# Altium PCB Oscilador.PcbDoc
Units mm, origin at the board's own origin, x right, y up, seen from the top; angles counter-clockwise.
Board outline 152.4 x 101.6 mm, 2 copper layers (Top Layer, Bottom Layer); 11 components, 10 nets, 31 pads, 2 vias.
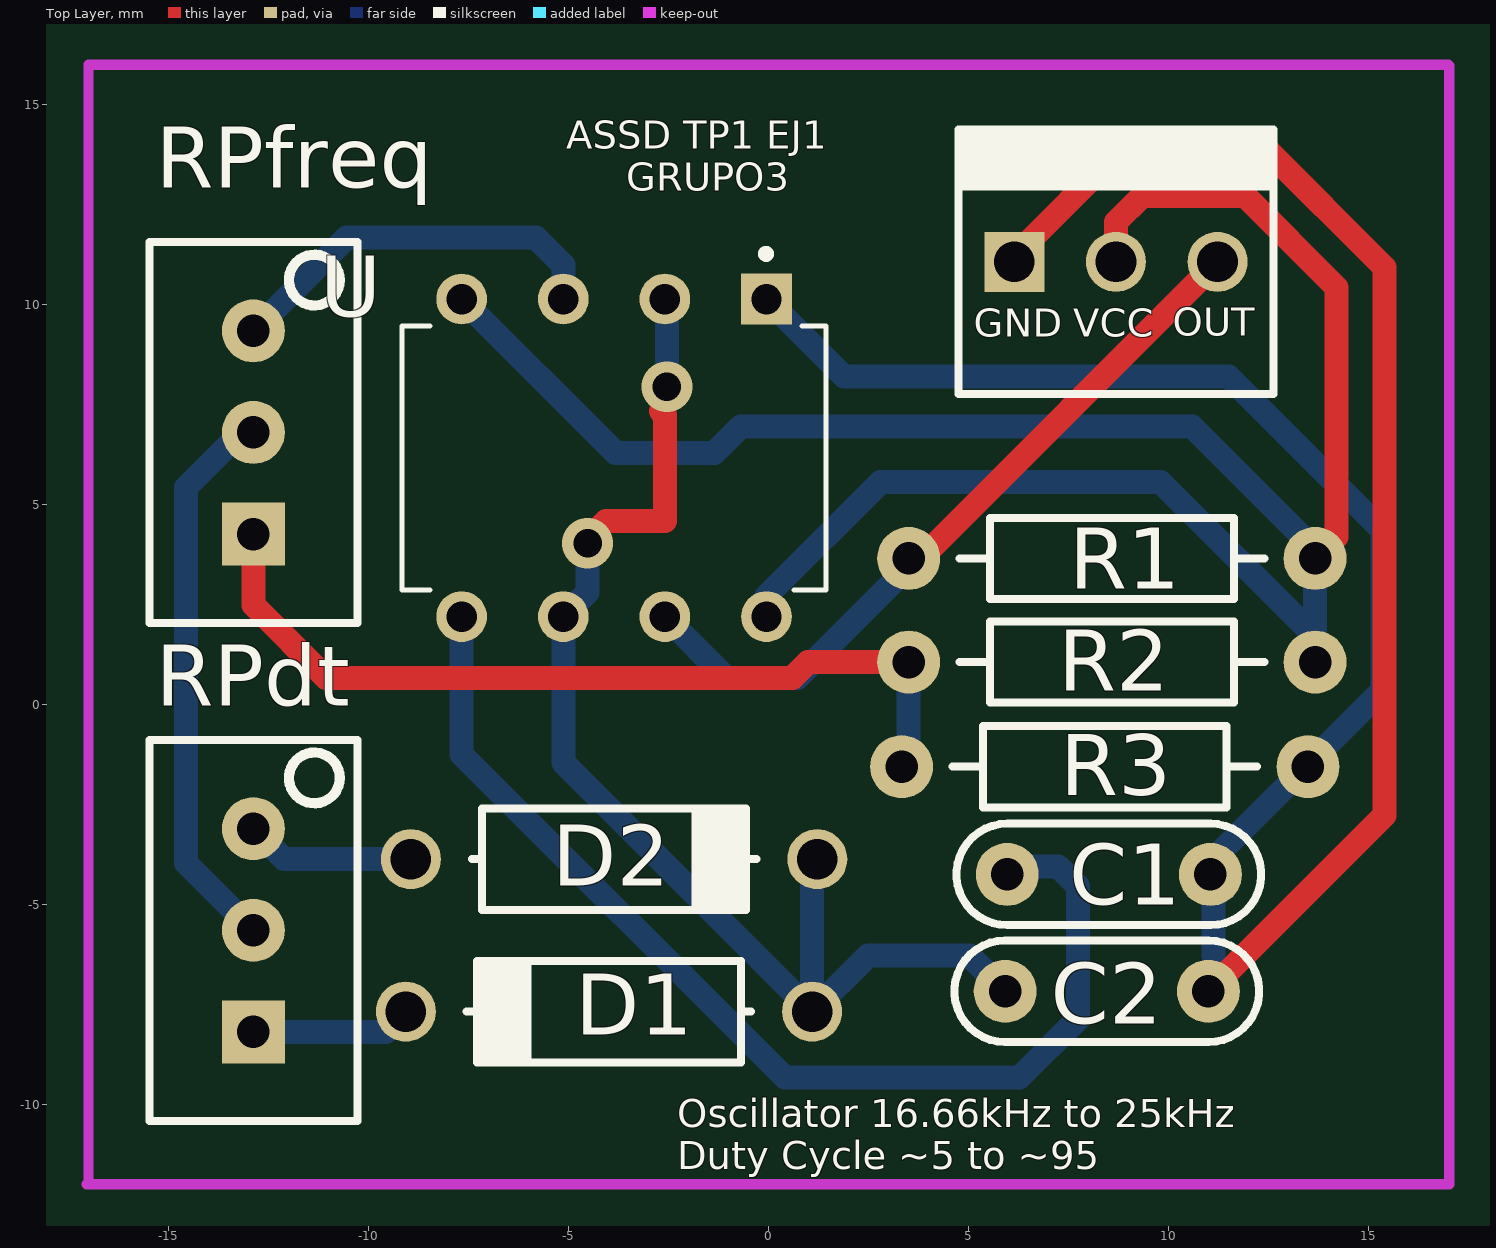
[diagram p0: Top Layer view]
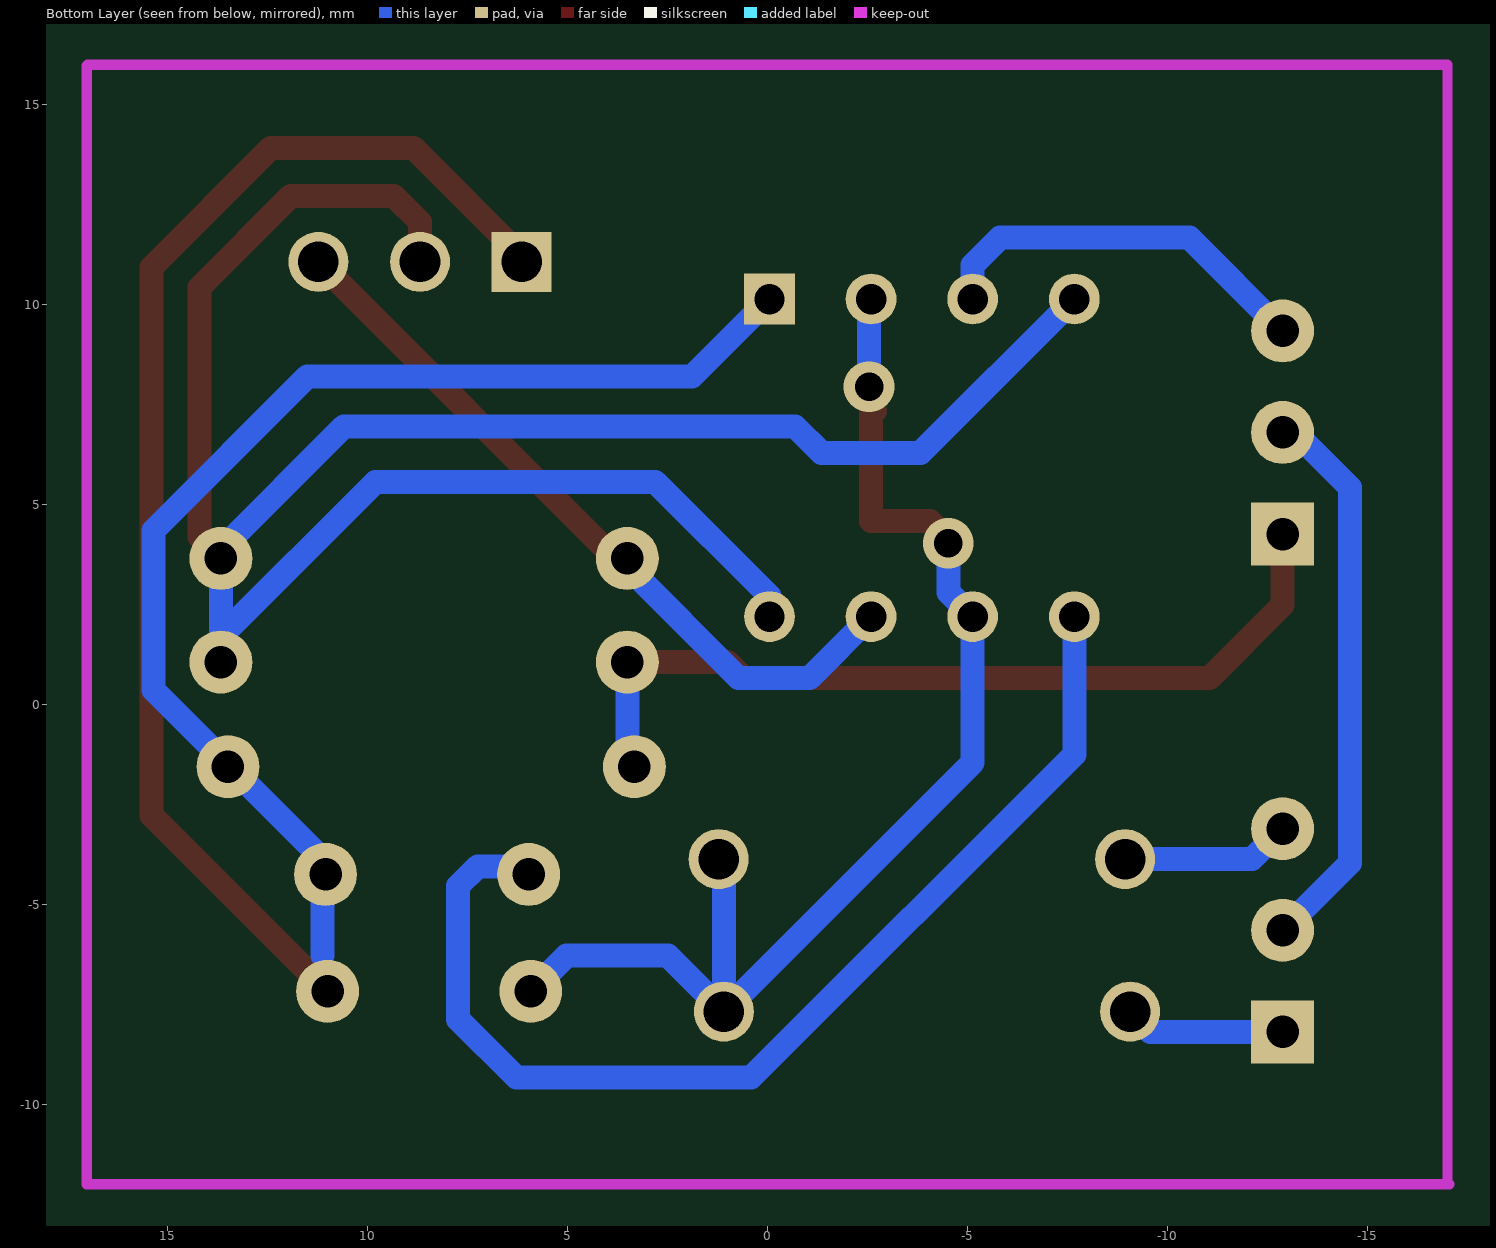
[diagram p1: Bottom Layer view, seen from below]
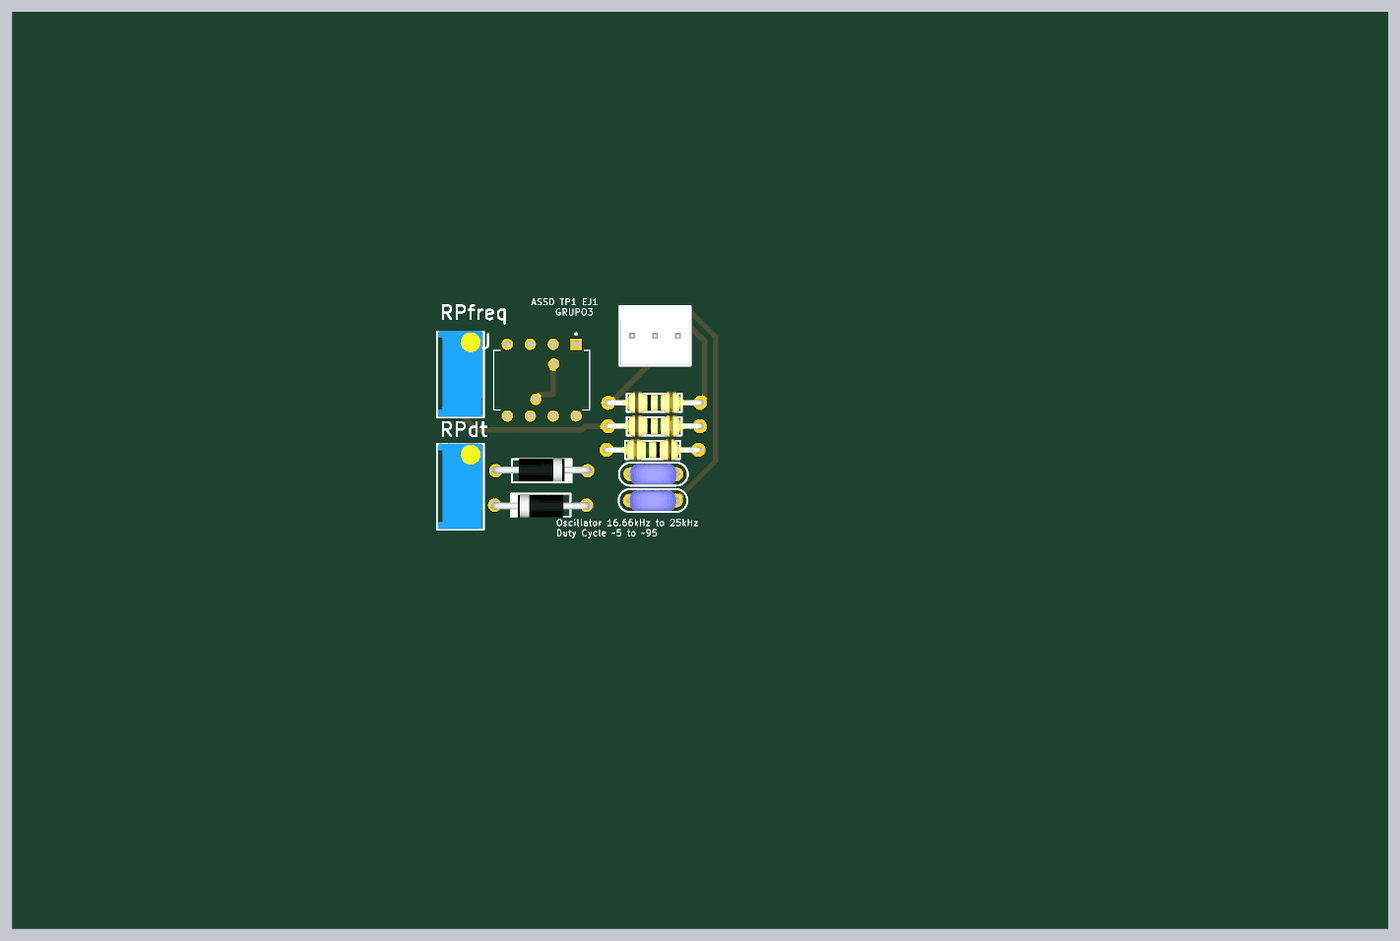
[diagram p2: 3D render of the assembled board from above, using the file's embedded part models]

## Layer stack, top to bottom
Top Solder: solder mask 0.0102, Solder Resist, Dk 3.5
Top Layer: signal copper 0.0356
Dielectric 1: dielectric 0.32, FR-4, Dk 4.8
Bottom Layer: signal copper 0.0356
Bottom Solder: solder mask 0.0102, Solder Resist, Dk 3.5

## Board outline
-62.509,-54.61 89.891,-54.61 89.891,46.99 -62.509,46.99

## Design rules (kind name [scope] priority, off if disabled: settings)
Clearance [All] p1: gap=0.6 ignorepadtopadclearanceinfootprint=FALSE
PolygonConnect [All] p1: connectstyle=Relief reliefconductorwidth=0.254 reliefentries=4 polygonreliefangle="90 Angle" airgapwidth=0.254
RoutingVias [All] p1: holewidth=0.711 width=1.27 viastyle="Through Hole" minholewidth=0.711 minwidth=1.27 maxholewidth=0.711 maxwidth=1.27
SolderMaskExpansion [All] p1: expansion=0.102
Width [All] p1: maxlimit=0.6 minlimit=0.6 preferedwidth=0.6
30 further rules are at their usual default settings.

## Classes and differential pairs
component class Oscilador: C1 C2 D1 D2 R1 R2 R3 RPdt RPfreq U

## Components (designator, comment, footprint, x,y, rotation, side; value= is the part's Value field where it differs from the comment)
C1 "CAP" CAP200 8.509,-4.242 r0 top
C2 "CAP" CAP200 8.458,-7.163 r0 top
D1 "DIODO" DO41 -3.988,-7.671 r180 top
D2 "DIODO" DO41 -3.861,-3.861 r0 top
R1 "RES" RES400 3.505,3.658 r0 top
R2 "RES" RES400 3.505,1.067 r0 top
R3 "RES" RES400 13.487,-1.549 r180 top
RPdt "POTENCIOMETRO" "PRESET V" -12.878,-5.639 r90 top
RPfreq "POTENCIOMETRO" "PRESET V" -12.878,6.807 r90 top
U "NE555" DIP794W45P254L1060H508Q8 -3.861,6.172 r270 top
? "Comment" MOLEX3 6.147,11.074 r0 top

## Footprints (in the part's own frame and the unit in brackets; to place one, negate y for a bottom-side part, rotate by r counter-clockwise, add the part's x,y. Pads: shape width x height; smd on the part's side, far side on the other; paste and mask are expansions set on the pad)
CAP200 [mil]
  round 62 hole 32: 1(-100,0) 2(100,0)
  silkscreen extent -150,-50 150,50, body extent -110,-46 110,44, height 246
DIP794W45P254L1060H508Q8 [mm]
  rect 1.268x1.268 hole 0.76: 1(-3.97,3.81)
  round 1.268 hole 0.76: 2(-3.97,1.27) 3(-3.97,-1.27) 4(-3.97,-3.81) 5(3.97,-3.81) 6(3.97,-1.27) 7(3.97,1.27) 8(3.97,3.81)
  silkscreen extent -5.2,-5.3 3.3,5.3
DO41 [mm]
  round 1.5 hole 1.016: 1(-5.08,0) 2(5.08,0)
  silkscreen extent -3.56,-1.27 3.56,1.27, body extent -5.46,-1.19 5.46,1.37, height 2.03
MOLEX3 [mm]
  rect 1.5x1.5 hole 1.016: 1(0,0)
  round 1.5 hole 1.016: 2(2.54,0) 3(5.08,0)
  silkscreen extent -1.4,-3.3 6.48,3.3, body extent -1.27,-3.17 6.35,3.17, height 10.74
"PRESET V" [mil]
  rect 62x62 hole 32: 1(-100,0)
  round 62 hole 32: 2(0,0) 3(100,0)
  silkscreen extent -188,-102 188,102, body extent -185,-95 190,95, height 455
RES400 [mil]
  round 62 hole 32: 1(0,0) 2(400,0)
  silkscreen extent 50,-40 350,40, body extent -12,-45 412,46, height 96

## Part data
U: "555 Type, Timer/Oscillator _Single_ IC 100kHz 8-SOIC", Package="SOIC-8 Conrad", Availability=Unavailable, MF="Texas Instruments", MP=NE555, Price=None, SnapEDA_Link=https://www.snapeda.com/parts/NE555/Texas%20Instruments/view-part/1756807/?ref=snap

## Via types
v1: diameter 1.27, hole 0.711, Top Layer to Bottom Layer, 2 vias

## Nets (pads, with @x,y where several pads share a name; then routed paths per layer and width w, separated by ;. In a path a pad name is that pad's centre, name@x,y a point inside that pad or via, vN(x,y) a via of type N, cw(c..) or ccw(c..) an arc to the next point about the centre after c; other vN are vias at no path point)
GND: ?.1 C1.2 C2.2 R3.1 U.1 | length 61.9
  Top Layer w0.6: ?.1 6.147,11.222 8.849,13.924 12.407,13.924 15.399,10.933 15.399,-2.762 C2.2
  Bottom Layer w0.6: U.1 1.887,8.204 11.505,8.204 15.353,4.357 15.353,0.367 11.125,-3.861 11.125,-6.274
NetC1_1: C1.1 U.5 | length 28.2
  Bottom Layer w0.6: U.5 -7.671,-1.241 0.409,-9.321 6.275,-9.321 7.733,-7.863 7.733,-4.532 7.239,-4.039 6.172,-4.039 C1.1
NetC2_1: C2.1 D1.1 D2.2 U.2 U.6 | length 31.1
  Top Layer w0.6: v1@-4.394,4.267 -4.064,4.597 -2.591,4.597 -2.591,7.239 v1@-2.692,7.341
  Bottom Layer w0.6: v1(-4.521,4.039) -4.521,2.812 U.6 -5.131,-1.448 D1.1 ; U.2 -2.54,10.091 v1(-2.54,7.95) ; D2.2 1.092,-3.988 D1.1 ; C2.1 5.029,-6.274 2.489,-6.274 D1.1
NetD1_2: D1.2 RPdt.1 | length 4
  Bottom Layer w0.6: RPdt.1 -9.576,-8.179 D1.2
NetD2_1: D2.1 RPdt.3 | length 4.3
  Bottom Layer w0.6: RPdt.3 -12.116,-3.861 D2.1
NetR1_1: ?.3 R1.1 U.7 | length 18.9
  Top Layer w0.6: R1.1 3.81,3.658 ?.3
  Bottom Layer w0.6: U.7 -1.057,0.668 0.72,0.668 3.505,3.453 R1.1
NetR2_1: R2.1 R3.2 RPfreq.1 | length 21.8
  Top Layer w0.6: RPfreq.1 -12.878,2.489 -11.057,0.668 0.595,0.668 0.993,1.067 R2.1
  Bottom Layer w0.6: R3.2 3.505,-1.372 R2.1
NetRPdt_2: RPdt.2 RPfreq.2 | length 14
  Bottom Layer w0.6: RPdt.2 -14.565,-3.951 -14.565,5.427 -13.185,6.807 RPfreq.2
NetRPfreq_3: RPfreq.3 U.3 | length 9.8
  Bottom Layer w0.6: RPfreq.3 -10.549,11.676 -5.809,11.676 -5.131,10.998 U.3
VCC: ?.2 R1.2 R2.2 U.4 U.8 | length 58.4
  Top Layer w0.6: ?.2 8.687,12.065 9.346,12.724 11.91,12.724 14.199,10.436 14.199,4.191 R1.2
  Bottom Layer w0.6: U.4 -3.828,6.299 -1.353,6.299 -0.693,6.96 10.592,6.96 13.665,3.886 R1.2 13.665,1.711 9.803,5.574 2.806,5.574 -0.051,2.717 U.8

## Keep-outs
Keep-Out Layer:
  lines w0.254: -17.043,-11.989 -17,-11.945 -17,16 17,16 17.018,15.982 17.018,-11.989 -17.043,-11.989

## Silkscreen, mask and mechanical layers (free items; w line width, h text height)
Top Overlay:
  text "ASSD TP1 EJ1 /      GRUPO3" at -5.055,12.852 h0.7
  text "OUT" at 10.109,9.22 h0.7
  text "GND" at 5.131,9.195 h0.7
  text "VCC" at 7.62,9.195 h0.7
  text "Oscillator 16.66kHz to 25kHz / Duty Cycle ~5 to ~95" at -2.286,-11.608 h0.7